# Altium PCB project_3.PcbDoc
Units mil, origin at the board's own origin, x right, y up, seen from the top; angles counter-clockwise.
Board outline 3855 x 2915 mil, 2 copper layers (Top Layer, Bottom Layer); 8 components, 40 nets, 96 pads, 6 vias.
Unrouted connection lines stored in the file: 5.
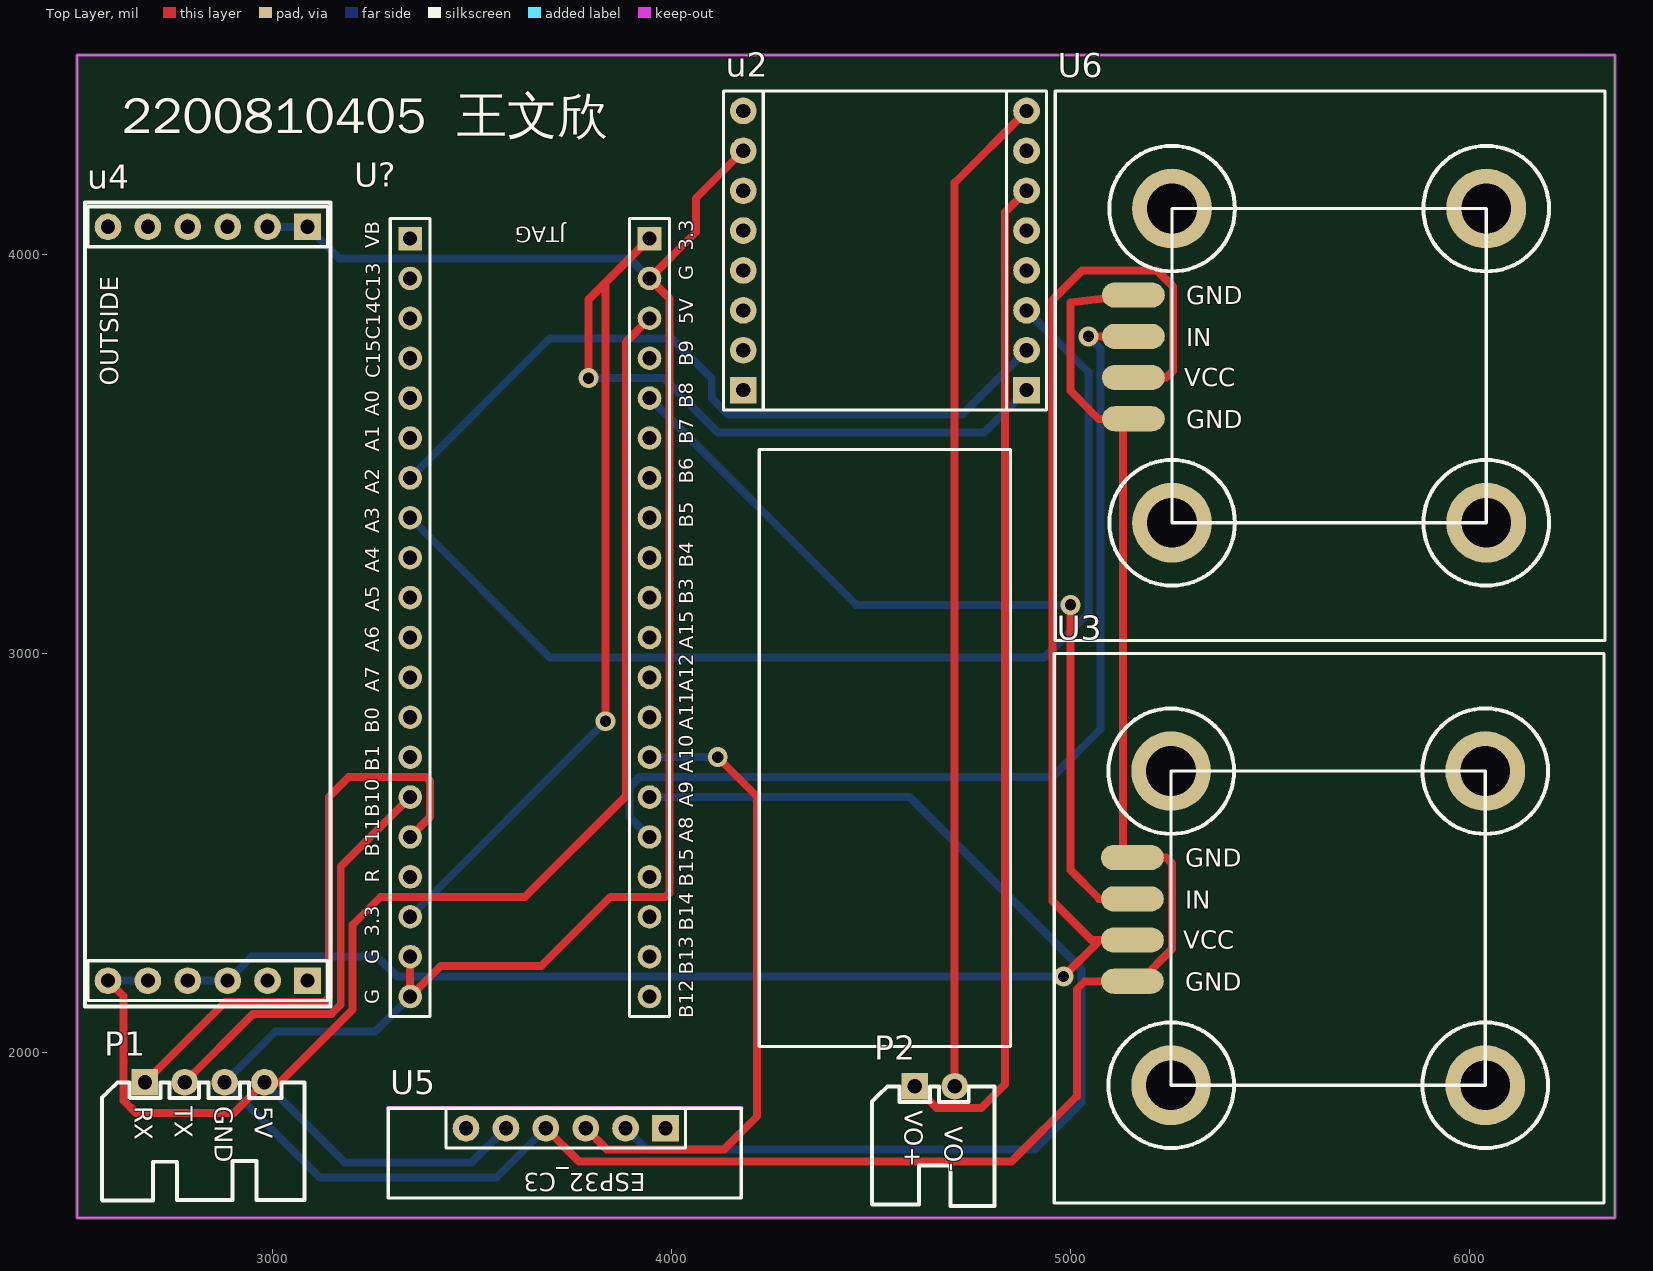
[diagram p0: Top Layer view]
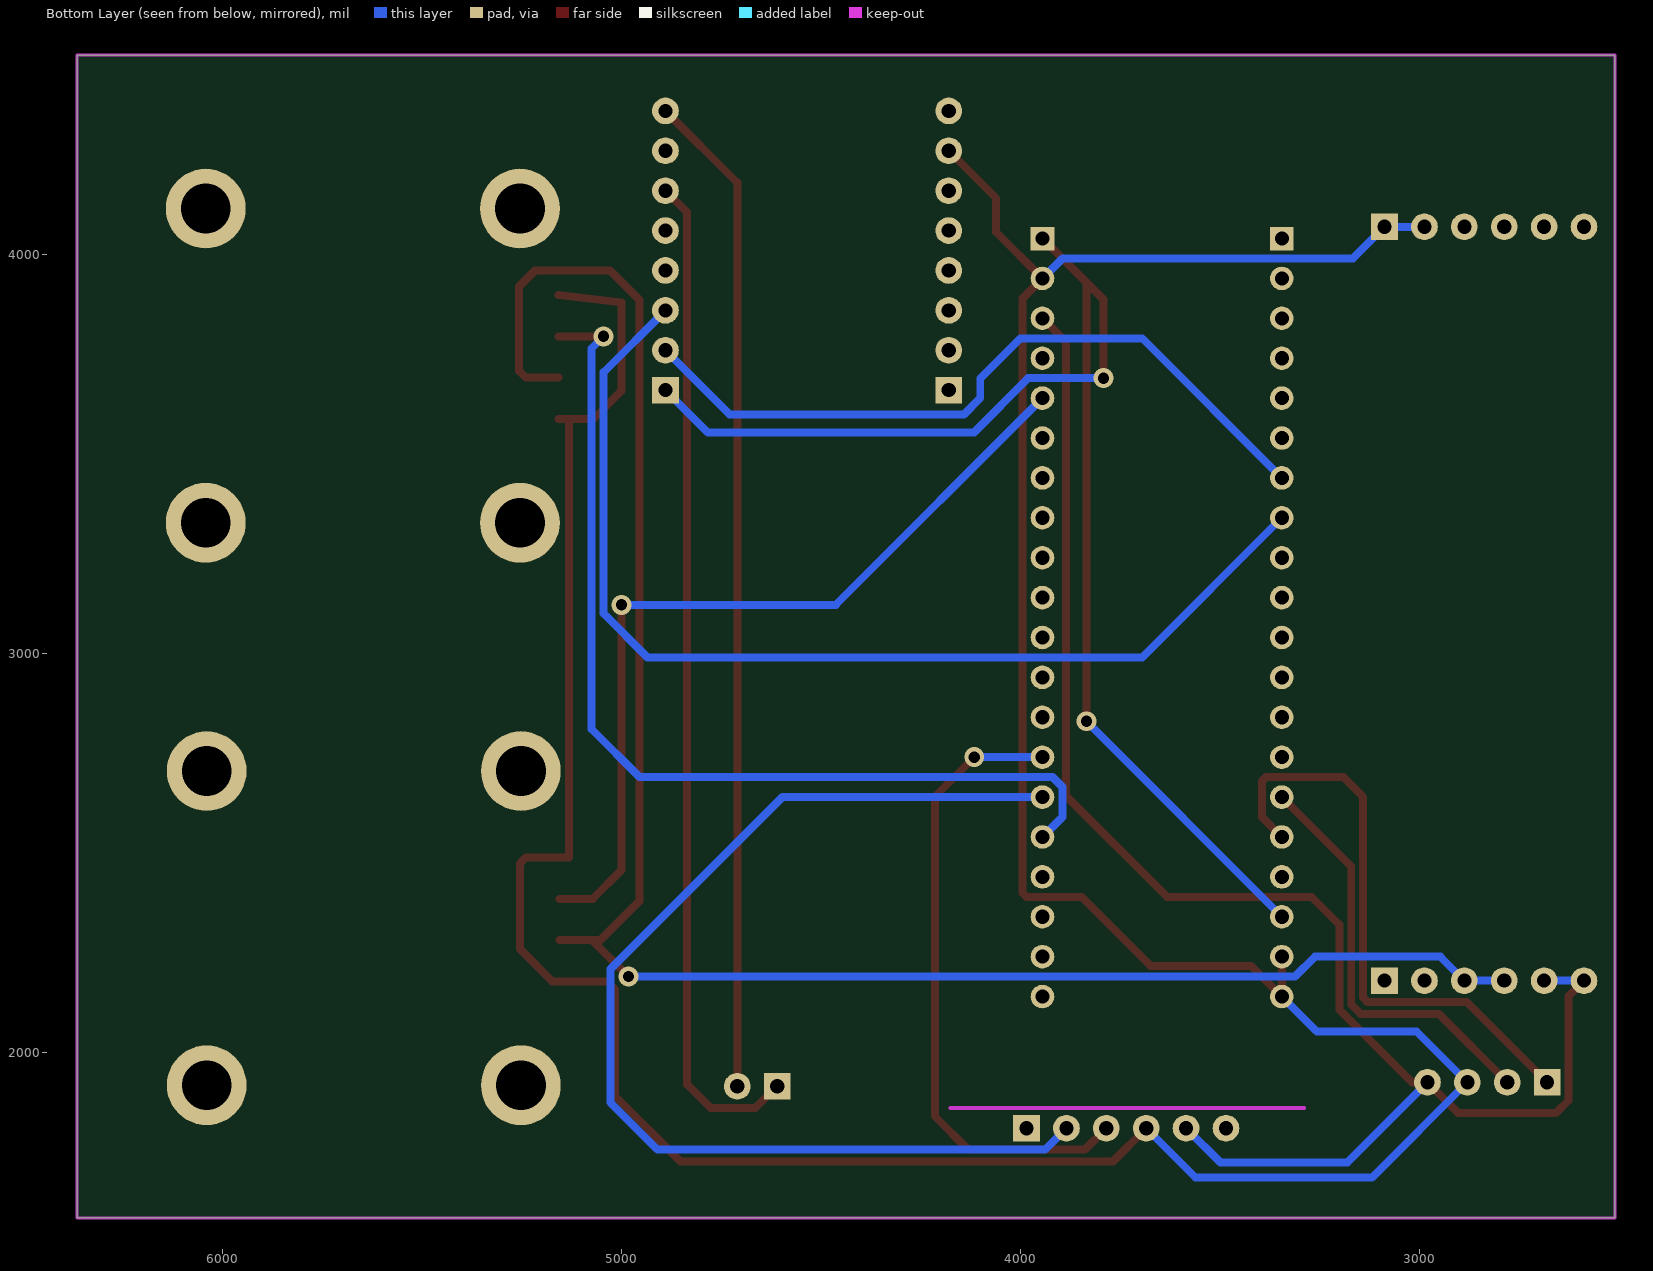
[diagram p1: Bottom Layer view, seen from below]

## Layer stack, top to bottom
Top Solder: solder mask 0.4, Solder Resist, Dk 3.5
Top Layer: signal copper 1.4
Dielectric 1: dielectric 12.6, FR-4, Dk 4.8
Bottom Layer: signal copper 1.4
Bottom Solder: solder mask 0.4, Solder Resist, Dk 3.5

## Board outline
2510,1585 2510,4500 6365,4500 6365,1585

## Design rules (kind name [scope] priority, off if disabled: settings)
Clearance [All] p1: gap=10 ignorepadtopadclearanceinfootprint=FALSE
ComponentClearance [All] p1: gap=0 collisioncheckmode=3 verticalgap=100000 showdistances=FALSE
PolygonConnect [All] p1: connectstyle=Relief reliefconductorwidth=10 reliefentries=4 polygonreliefangle="90 Angle" airgapwidth=10
RoutingVias [All] p1: holewidth=28 width=50 viastyle="Through Hole" minholewidth=28 minwidth=50 maxholewidth=28 maxwidth=50
SolderMaskExpansion [All] p1: expansion=4 istentingtop=FALSE
SupplyNets "Schematic Supply Nets_3" [InNet('3V3')] p1: voltage=0.000
SupplyNets "Schematic Supply Nets_2" [InNet('5V')] p2: voltage=0.000
SupplyNets "Schematic Supply Nets_1" [InNet('GND')] p3: voltage=0.000
SupplyNets "Schematic Supply Nets" [InNet('5V_POW')] p4: voltage=0.000
Width [All] p1: maxlimit=100 minlimit=10 preferedwidth=20 minimp=50.000000 maximp=50.000000 favimp=50.000000
29 further rules are at their usual default settings.

## Components (designator, comment, footprint, x,y, rotation, side; value= is the part's Value field where it differs from the comment)
P1 "port_uart_4p" XH2.54_4P 2825,1770 r180 top
P2 "port_mot_2p" XH2.54_2P 4665,1790 r180 top
u2 "mod_mp3" MOD_MP3 4525,4005 r180 top
U3 "mod_ws2812" MOD_WS2812 5672.6,2305 r0 top
u4 "pow_hw_1" pow_hw_1 2860,3050 r0 top
U5 "c3_hw_1" C3_HW_1 3735,1810 r180 top
U6 "mod_ws2812" MOD_WS2812 5675,3715 r0 top
U? "f1_hw_2_gw" F1_HW_2_GW 3635,3100 r90 top

## Footprints (in the part's own frame and the unit in brackets; to place one, negate y for a bottom-side part, rotate by r counter-clockwise, add the part's x,y. Pads: shape width x height; smd on the part's side, far side on the other; paste and mask are expansions set on the pad)
C3_HW_1 [mm]
  rect 1.7x1.7 hole 0.9: 1(-6.35,0)
  round 1.7 hole 0.9: 2(-3.81,0) 3(-1.27,0) 4(1.27,0) 5(3.81,0) 6(6.35,0)
  Keep-Out Layer lines w0.254: 11.303,-1.27 -11.176,-1.27
  silkscreen extent -11.18,-1.27 11.3,4.45, body extent -11.18,-1.27 11.3,4.45, height 8.5
F1_HW_2_GW [mm]
  rect 1.5x1.5 hole 0.9: 1(23.876,7.366) 21(23.876,-7.874)
  round 1.5 hole 0.9: 2(21.336,7.366) 3(18.796,7.366) 4(16.256,7.366) 5(13.716,7.366) 6(11.176,7.366) 7(8.636,7.366) 8(6.096,7.366) 9(3.556,7.366) 10(1.016,7.366) 11(-1.524,7.366) 12(-4.064,7.366) 13(-6.604,7.366) 14(-9.144,7.366) 15(-11.684,7.366) 16(-14.224,7.366) 17(-16.764,7.366) 18(-19.304,7.366) 19(-21.844,7.366) 20(-24.384,7.366) 22(21.336,-7.874) 23(18.796,-7.874) 24(16.256,-7.874) 25(13.716,-7.874) 26(11.176,-7.874) 27(8.636,-7.874) 28(6.096,-7.874) 29(3.556,-7.874) 30(1.016,-7.874) 31(-1.524,-7.874) 32(-4.064,-7.874) 33(-6.604,-7.874) 34(-9.144,-7.874) 35(-11.684,-7.874) 36(-14.224,-7.874) 37(-16.764,-7.874) 38(-19.304,-7.874) 39(-21.844,-7.874) 40(-24.384,-7.874)
  silkscreen extent -25.65,-9.14 25.15,8.64, body extent -26.92,-11.56 26.42,11.18, height 0.25
MOD_MP3 [mm]
  rect 1.7x1.7 hole 0.9: 1(-9.271,8.763) 16(8.763,8.763)
  round 1.7 hole 0.9: 2(-9.271,6.223) 3(-9.271,3.683) 4(-9.271,1.143) 5(-9.271,-1.397) 6(-9.271,-3.937) 7(-9.271,-6.477) 8(-9.271,-9.017) 9(8.763,-9.017) 10(8.763,-6.477) 11(8.763,-3.937) 12(8.763,-1.397) 13(8.763,1.143) 14(8.763,3.683) 15(8.763,6.223)
  silkscreen extent -10.54,-10.29 10.03,10.03, body extent -10.54,-10.41 10.03,10.1, height 8.5
MOD_WS2812 [mm]
  round 5.08 hole 3.175: 0(-10.668,-9.84) 0(-10.668,10.16) 0(9.332,-9.84) 0(9.332,10.16)
  oval 4x1.6 smd paste+0 mask+0.051: 1(-13.137,4.655) 2(-13.137,2.03) 3(-13.137,-0.595) 4(-13.137,-3.219)
  silkscreen extent -18.11,-17.35 16.89,17.65, body extent -18.2,-17.35 16.89,17.56, height 0.25
pow_hw_1 [mm] "pow_hw_1"
  round 1.7 hole 0.9: 0(3.24,25.897) 1(-1.84,25.897) 1(0.7,25.897) 2(-6.92,25.897) 2(-4.38,25.897) 3(3.24,-22.103) 4(-1.84,-22.103) 4(0.7,-22.103) 5(-6.92,-22.103) 5(-4.38,-22.103)
  rect 1.7x1.7 hole 0.9: 0(5.78,25.897) 3(5.78,-22.103)
  silkscreen extent -8.38,-23.75 7.24,27.43, body extent -8.38,-23.75 7.24,27.43, height 8.5
XH2.54_2P [mm]
  rect 1.7x1.7 hole 0.9: 1(1.397,-3.175)
  round 1.7 hole 0.9: 2(-1.143,-3.175)
  silkscreen extent -3.68,-3.18 4.11,4.44, body extent -3.64,-3.52 3.9,4.17, height 5.73
XH2.54_4P [mm]
  rect 1.7x1.7 hole 0.9: 1(3.683,-3.937)
  round 1.7 hole 0.9: 2(1.143,-3.937) 3(-1.397,-3.937) 4(-3.937,-3.937)
  silkscreen extent -6.48,-3.94 6.4,3.59, body extent -6.44,-4.29 6.18,3.41, height 5.73

## Part data
P1: "串口接口/SPP蓝牙模块 / XH2.54弯排针4p/4p排母"
P2: "开环直流电机接口 / XH2.54弯排针2p"
u2: "MP3模块"
U3 U6: "ws2812*16"
u4: "三路降压电源模块 / 6p排母*2"
U5: "ESP32C3蓝牙模块 / 6p排母"

## Via types
v1: diameter 50, hole 28, Top Layer to Bottom Layer, 6 vias

## Nets (pads, with @x,y where several pads share a name; then routed paths per layer and width w, separated by ;. In a path a pad name is that pad's centre, name@x,y a point inside that pad or via, vN(x,y) a via of type N, cw(c..) or ccw(c..) an arc to the next point about the centre after c; other vN are vias at no path point)
3V3: u2.1 U?.18 U?.21 | length 3404.6
  Top Layer w20: v1(3792,3690) 3792,3887 3835,3930 ; v1(3835,2830) 3835,3930 ; U?.21 3835,3930
  Bottom Layer w20: U?.18 v1(3835,2830) ; v1(3792,3690) 3981,3690 4117,3554 4784,3554 u2.1
5V: P1.4 u4.5 U5.5 U?.23 | length 4088.2
  Top Layer w20: u4.5@2587.56,2179.8 2626,2141.37 2626,1880 2658,1848 2903,1848 P1.4 3018.66,1925 3201.03,2107.37 3201.03,2320 3271.03,2390 3633,2390 3885.85,2642.85 3885.85,3780.85 U?.23
  Bottom Layer w20: u4.5@2587.56,2179.8 u4.5@2687.56,2179.8 ; P1.4 3181,1724 3499,1724 U5.5
5V_POW: U3.3 u4.4 U6.3 | length 4784.8
  Top Layer w20: v1(4983,2190) 5074.58,2281.58 ; U3.3 5074.58,2281.58 ; U6.3 5240,3691.58 5257,3708.58 5257,3920 5217,3960 5029.07,3960 4955,3885.93 4955,2379.58 5053,2281.58 5074.58,2281.58
  Bottom Layer w20: u4.4@2787.56,2179.8 2887.56,2179.8 2947.76,2240 3262,2240 3312,2190 v1(4983,2190)
GND: P1.3 u2.10 U3.1 U3.4 u4.0 U5.4 U6.1 U6.4 U?.19 U?.20 U?.22 | length 9348.9
  Top Layer w20: U?.19 U?.20 3422,2217 3674,2217 3847,2390 3985,2390 3995,2400 3995,3890 U?.22 4061,4056 4061,4141 u2.10 ; U5.4 3768.47,1726.53 4852.53,1726.53 5016,1890 5016,2158.25 5036,2178.25 U3.4 5174.25,2178.25 5255,2259 5255,2473.25 5240,2488.25 U3.1 5132,2488.25 U6.4@5132,3588.25 ; U6.4 U6.4@5132,3588.25 ; U6.1 5000,3879.41 5000,3658.25 5070,3588.25 U6.4@5132,3588.25
  Bottom Layer w20: u4.0@2987.56,4069.57 3087.56,4069.57 3167.13,3990 3895,3990 U?.22 ; U?.20 3257,2052 3007,2052 P1.3 3119,1686 3561,1686 U5.4
NRST: U?.17
PA0: U?.5
PA1: U?.6
PA2: u2.2 U?.7 | length 1864.5
  Bottom Layer w20: U?.7 3695,3790 4000,3790 4101,3689 4101,3640 4142,3599 4729,3599 u2.2
PA3: u2.3 U?.8 | length 2714.7
  Bottom Layer w20: U?.8 3695,2990 4935,2990 5045,3100 5045,3705 u2.3
PA4: U?.9
PA5: U?.10
PA6: U?.11
PA7: U?.12
PA8: U6.2 U?.36 | length 2495.9
  Top Layer w20: v1(5045,3794.92) U6.2
  Bottom Layer w20: U?.36 3895,2590 3895,2665 3920,2690 4955,2690 5075,2810 5075,3764.92 v1(5045,3794.92)
PA9: U5.2 U?.35 | length 2810.8
  Bottom Layer w20: U5.2 3939,1756 4910,1756 5028,1874 5028,2209 4597,2640 U?.35
PA10: U5.3 U?.34 | length 1598.7
  Top Layer w20: U5.3 3838.47,1756.53 4131.53,1756.53 4215,1840 4215,2641 v1(4116,2740)
  Bottom Layer w20: U?.34 v1(4116,2740)
PA11: U?.33
PA12: U?.32
PA15: U?.31
PB0: U?.13
PB1: U?.14
PB3: U?.30
PB4: U?.29
PB5: U?.28
PB6: U?.27
PB7: U?.26
PB8: U3.2 U?.25 | length 2119.8
  Top Layer w20: v1(5000,3122) 5000,2457 5072.08,2384.92 U3.2
  Bottom Layer w20: U?.25 4463,3122 v1(5000,3122)
PB9: U?.24
PB10: P1.2 U?.15 | length 1063.9
  Top Layer w20: P1.2 2951.34,2096.34 3147.37,2096.34 3171.03,2120 3171.03,2466.03 U?.15
PB11: P1.1 U?.16 | length 1491.2
  Top Layer w20: P1.1 2881.34,2126.34 3130,2126.34 3141.03,2137.37 3141.03,2640 3191.03,2690 3385,2690 3395,2680 3395,2590 U?.16
PB12: U?.40
PB13: U?.39
PB14: U?.38
PB15: U?.37
PC13: U?.2
PC14: U?.3
PC15: U?.4
VBAT: U?.1
VO+: P2.1 u2.6 | length 2535.2
  Top Layer w20: P2.1 4664,1861 4777,1861 4836,1920 4836,4106 u2.6
VO-: P2.2 u2.8 | length 2519.6
  Top Layer w20: P2.2 4710,4180 u2.8
pads on no net: u2.4 u2.5 u2.7 u2.9 u2.11 u2.12 u2.13 u2.14 u2.15 u2.16 U3.0 u4.1 u4.2 u4.3 U5.1 U5.6 U6.0

## Keep-outs
Keep-Out Layer:
  the board outline again, w7.87

## Silkscreen, mask and mechanical layers (free items; w line width, h text height)
Top Overlay:
  lines w7.87: 4220,2015 4849.92,2015 4849.92,3511.06 4220,3511.06 4220,2015
  text "2200810405  王文欣" at 2622.62,4273.77 h157.48

## Text inside footprints (layer, text, board x,y; h text height)
P1: Top Overlay "RX" at 2655,1865 h45 r270; Top Overlay "TX" at 2755,1865 h45 r270; Top Overlay "GND" at 2855,1865 h45 r270; Top Overlay "5V" at 2955,1865 h45 r270
P2: Top Overlay "VO-" at 4685,1815 h45 r270; Top Overlay "VO+" at 4585,1855 h45 r270
U3: Top Overlay "VCC" at 5282.6,2260 h45; Top Overlay "GND" at 5287.6,2155 h45; Top Overlay "IN" at 5287.6,2360 h45; Top Overlay "GND" at 5287.6,2465 h45
u4: Top Overlay "OUTSIDE" at 2613.77,3670.84 h45 r90
U5: Top Overlay "ESP32_C3" at 3935,1697.5 h45 r180
U6: Top Overlay "VCC" at 5285,3670 h45; Top Overlay "GND" at 5290,3565 h45; Top Overlay "IN" at 5290,3770 h45; Top Overlay "GND" at 5290,3875 h45
U?: Top Overlay "JTAG" at 3735,4070 h39.37 r180; Top Overlay "R" at 3268,2425 h35.43 r90; Top Overlay "B11" at 3268,2491 h35.43 r90; Top Overlay "B10" at 3268,2590 h35.43 r90; Top Overlay "B1" at 3268,2705 h35.43 r90; Top Overlay "B0" at 3268,2800 h35.43 r90; Top Overlay "A0" at 3268,3595 h35.43 r90; Top Overlay "A1" at 3268,3506 h35.43 r90; Top Overlay "A2" at 3268,3399.29 h35.43 r90; Top Overlay "A3" at 3268,3301.43 h35.43 r90; Top Overlay "A4" at 3268,3202 h35.43 r90; Top Overlay "A5" at 3268,3104 h35.43 r90; Top Overlay "A6" at 3268,3003 h35.43 r90; Top Overlay "A7" at 3268,2903 h35.43 r90; Top Overlay "VB" at 3268,4016 h35.43 r90; Top Overlay "3.3" at 3268,2290 h35.43 r90; Top Overlay "G" at 3268,2221 h35.43 r90; Top Overlay "G" at 3268,2121 h35.43 r90; Top Overlay "B12" at 4055,2085 h35.43 r90; Top Overlay "B13" at 4055,2195 h35.43 r90; Top Overlay "B14" at 4055,2305 h35.43 r90; Top Overlay "B15" at 4055,2415 h35.43 r90; Top Overlay "A8" at 4055,2525 h35.43 r90; Top Overlay "A9" at 4055,2615 h35.43 r90; Top Overlay "A10" at 4055,2700 h35.43 r90; Top Overlay "A11" at 4055,2808 h35.43 r90; Top Overlay "A12" at 4055,2903 h35.43 r90; Top Overlay "A15" at 4055,3011 h35.43 r90; Top Overlay "B3" at 4055,3123 h35.43 r90; Top Overlay "B4" at 4055,3215 h35.43 r90; Top Overlay "B5" at 4055,3315 h35.43 r90; Top Overlay "B6" at 4055,3425 h35.43 r90; Top Overlay "B7" at 4055,3525 h35.43 r90; Top Overlay "B8" at 4055,3615 h35.43 r90; Top Overlay "B9" at 4055,3720 h35.43 r90; Top Overlay "5V" at 4055,3825 h35.43 r90; Top Overlay "G" at 4055,3935 h35.43 r90; Top Overlay "3.3" at 4055,4010 h35.43 r90; Top Overlay "C15C14C13" at 3270,3690 h35.43 r90